# Altium PCB 把手指纹锁2020926.PcbDoc
Units mm, origin at the board's own origin, x right, y up, seen from the top; angles counter-clockwise.
Board outline 143.51 x 21.34 mm, 2 copper layers (Top Layer, Bottom Layer); 78 components, 61 nets, 264 pads, 198 vias.
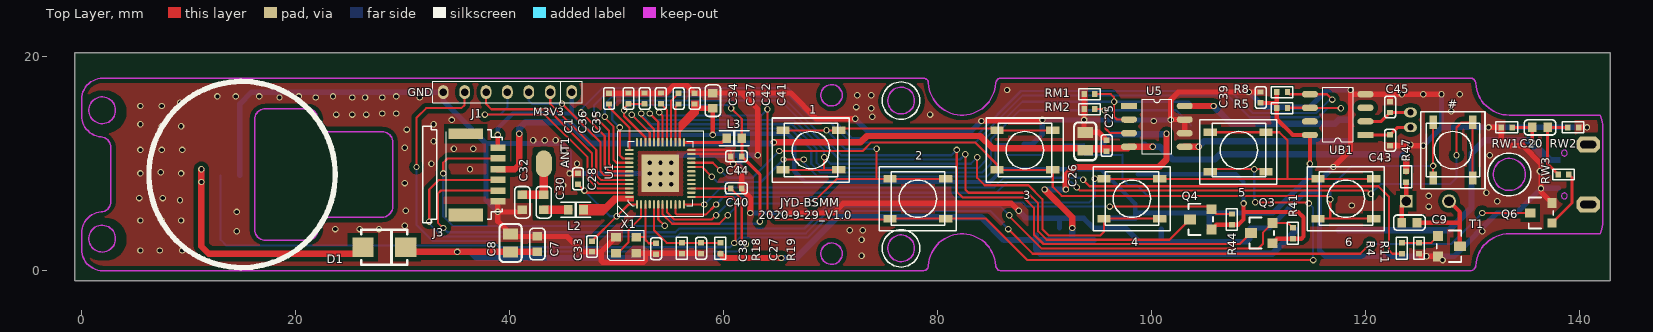
[diagram p0: Top Layer view]
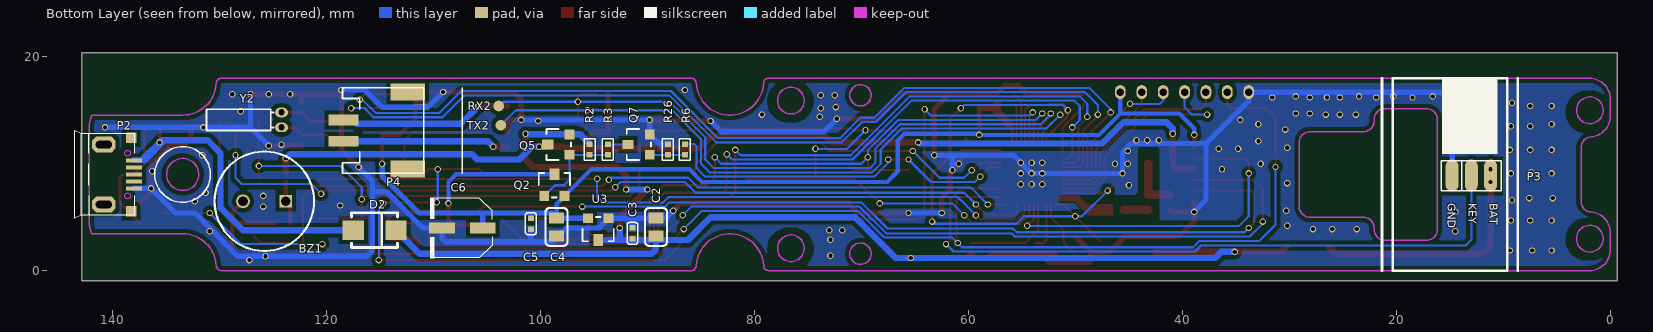
[diagram p1: Bottom Layer view, seen from below]
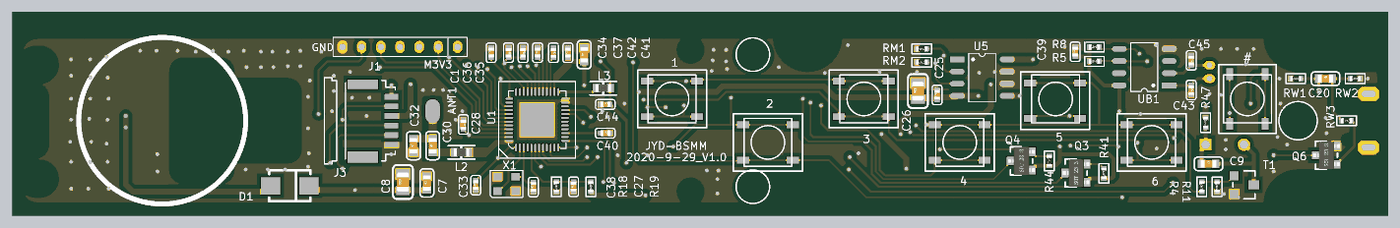
[diagram p2: 3D render of the assembled board from above, using the file's embedded part models]
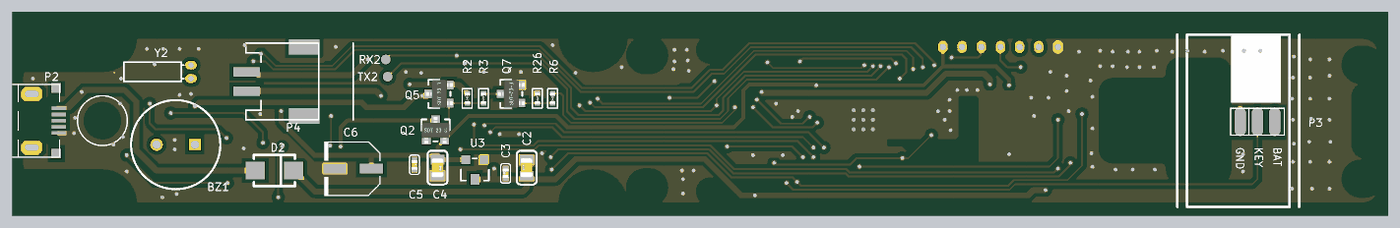
[diagram p3: 3D render of the assembled board from below, using the file's embedded part models]

## Layer stack, top to bottom
Top Layer: signal copper 0.0356
Dielectric: dielectric 0.32, FR-4, Dk 4.8
Bottom Layer: signal copper 0.0356

## Board outline
-0.652,20.395 -0.652,-0.941 142.858,-0.941 142.858,20.395 -0.398,20.395

## Design rules (kind name [scope] priority, off if disabled: settings)
Clearance Clearance_1 [All] p1 off: gap=0.4
Clearance [All] p2: gap=0.1
HoleToHoleClearance [All] p1: gap=0 allowstackedmicrovias=TRUE
MinimumSolderMaskSliver [All] p1: minsoldermaskwidth=0
PolygonConnect [All] p1: connectstyle=Direct reliefconductorwidth=0.254 reliefentries=4 polygonreliefangle="90 Angle" airgapwidth=0.254
RoutingVias [All] p1: holewidth=0.4 width=0.6 viastyle="Through Hole" minholewidth=0.3 minwidth=0.5 maxholewidth=0.4 maxwidth=0.6
SilkToSilkClearance [All] p1: silktosilkclearance=0
SilkToSolderMaskClearance [IsPad] p1: minsilkscreentomaskgap=0 clearancetoexposedcopper=TRUE
SolderMaskExpansion [All] p1: expansion=0.102
Width [All] p1: maxlimit=2 minlimit=0.2 preferedwidth=0.254
24 further rules are at their usual default settings.

## Components (designator, comment, footprint, x,y, rotation, side; value= is the part's Value field where it differs from the comment)
1 "SW" KEY_5.2*3.7*6.4 68.16,11.275 r180 top locked
2 "SW" KEY_5.2*3.7*6.4 78.16,6.735 r180 top locked
3 "SW" KEY_5.2*3.7*6.4 88.16,11.275 r180 top locked
4 "SW" KEY_5.2*3.7*6.4 98.16,6.735 r180 top locked
5 "SW" KEY_5.2*3.7*6.4 108.1,11.1 r180 top
6 "SW" KEY_5.2*3.7*6.4 118.16,6.735 r180 top locked
# "SW" KEY_5.2*3.7*6.4 128.16,11.275 r90 top locked
ANT1 "ANT" ANT_mark 43.2,10 r90 top
BZ1 "BUZZER" BUZZER_D93_L40 125.8,6.5 r0 bottom locked
C1 "100nF" 0402C 49.3,16.1 r90 top
C2 "10uF" 0805C 89.2,4.1 r90 bottom
C3 "100nF" 0402C 91.4,3.5 r90 bottom
C4 "10uF" 0805C 98.5,4.1 r270 bottom
C5 "100nF" 0402C 100.9,4.4 r270 bottom
C6 "220uF" R5*5.8 107.3,4 r0 bottom
C7 "0.1uF" 0603C 42.6,2.5 r90 top
C8 "4.7UF/24V" 0805C 40.1,2.6 r90 top
C9 "10uF" 0603C 124.1,4.5 r0 top (schematic designator c9)
C20 "10uF" 0603C 136.3,13.4 r0 top
C25 "100nF" 0402C 95.8,11.7 r90 top
C26 "22uF" 0805C 93.8,12.1 r90 top
C27 "1nF" 0402C 57.9,2.1 r90 top
C28 "1uF" 0402C 46.4,8.6 r270 top
C30 "1.5pF" 0603C 43.2,6.4 r90 top
C32 "1pF" 0603C 41.2,6.4 r90 top
C33 "100nF" 0402C 47.7,2.271 r90 top
C34 "100nF" 0402C 54.142,16.108 r90 top
C35 "1uF" 0402C 52.628,16.108 r270 top
C36 "100nF" 0402C 51.114,16.108 r270 top
C37 "100nF" 0402C 55.8,16.1 r270 top
C38 "2.7pF" 0402C 53.7,2.071 r90 top
C39 "100nF" 0402C 110.2,16.2 r90 top
C40 "1nF" 0402C 61.197,7.7 r0 top
C41 "10uF" 0603C 59,15.9 r90 top
C42 "100nF" 0402C 57.3,16.1 r90 top
C43 "22pF" 0402C 122.3,12.2 r270 top
C44 "10uF" 0402C 61.2,10.7 r0 top
C45 "22pF" 0402C 122.3,15.3 r270 top
D1 "SS14" DO-214AA 28.3,2.2 r180 top
D2 "SS14" DO-214AA 115.5,3.8 r0 bottom
J1 "7P" 7P-2.0MM 45.8,16.7 r180 top
J3 "指纹串口" SM06B-SRSS-TB 38.9,9 r270 top locked
L2 "2nH" 0603L 46.2,5.7 r0 top
L3 "2.2UH" 0603L 61,12.4 r0 top
P2 "MICROUSB" MICRO-USB_F-B 139.4,9 r270 bottom
P3 "电池盒" 3P-1.8MM 14.8,8.9 r180 bottom
P4 "电机接口" S2B-PH-SM3-TB 116.9,13.1 r90 bottom
Q2 "SI2301" "SOT-23 - GDS" 98.7,8 r180 bottom
Q3 "BSS123W" "SOT-23 - GDS" 110.3,3.53 r90 top
Q4 "BSS123W" "SOT-23 - GDS" 104.6,4.8 r90 top
Q5 "SI2301" "SOT-23 - GDS" 98.3,11.8 r90 bottom
Q6 "PMBT3904" "SOT-23 - BCE" 136.4,5.4 r90 top
Q7 "PMBT3904" "SOT-23 - BCE" 90.8,11.8 r90 bottom
R2 "100K" 0402R 95.4,11.337 r270 bottom
R3 "1K" 0402R 93.7,11.336 r90 bottom
R4 "200R" 0402R 123.4,2.1 r270 top
R5 "10K" 0402R 112.2,15.2 r180 top
R6 "4.7K" 0402R 86.5,11.336 r90 bottom
R8 "10K" 0402R 112.2,16.7 r180 top
R11 "10K" 0402R 125,2.1 r270 top
R18 "100K%1" 0402R 56.1,2.1 r270 top
R19 "510%1" 0402R 59.7,2.1 r90 top
R26 "10K" 0402R 88.1,11.336 r90 bottom
R41 "10K" 0402R 113.2,3.5 r270 top
R44 "10K" 0402R 107.5,4.8 r270 top
R47 "10R" 0402R 123.8,8.8 r90 top
RM1 "10K" 0402R 94.2,16.508 r0 top
RM2 "10K" 0402R 94.2,15.108 r0 top
RW1 "100K" 0402R 133.2,13.4 r180 top
RW2 "100K" 0402R 139.4,13.4 r180 top
RW3 "100R" 0402R 138.5,9 r180 top
T1 "SS8050" SOT-23-3L 127.8,2.3 r270 top
U1 "BK3435QFN48_A" QFN48_6*6*0.4 54.1,9.1 r90 top
U3 "HT7533" SOT-23-3L 94.6,3.898 r0 bottom
U5 "CP2117" SOP8 100.5,13.5 r0 top
UB1 "PCF8563" SOP8 117.4,14.6 r180 top
X1 "16MHZ" XTAL3225 50.9,2.4 r0 top
Y2 "32.768KHZ" 晶振-9 124.2,13.4 r90 bottom

## Footprints (in the part's own frame and the unit in brackets; to place one, negate y for a bottom-side part, rotate by r counter-clockwise, add the part's x,y. Pads: shape width x height; smd on the part's side, far side on the other; paste and mask are expansions set on the pad)
3P-1.8MM [mm]
  oval 1.2x3 smd: 1(0,0) 2(1.8,0) 3(3.6,0)
  silkscreen extent -1,-1.4 4.6,1.4
7P-2.0MM [mm]
  oval 1x1.3 hole 0.7 mask+0.05: 1(0,0) 2(2,0) 3(4,0) 4(6,0) 5(8,0) 6(10,0) 7(12,0)
  silkscreen extent -1,-1 13,1
0402C [mil]
  rect 20x22 smd mask+2: 1(-20,0) 2(20,0)
  silkscreen extent -40,-20 40,20, body extent -19,-12 20,12, height 8
0402R [mil]
  rect 20x22 smd mask+2: 1(-20,0) 2(20,0)
  silkscreen extent -40,-20 40,20, body extent -23,-11 23,11, height 16
0603C [mm]
  rect 0.8x0.9 smd: 1(-0.711,0) 2(0.711,0)
  silkscreen extent -1.47,-0.71 1.47,0.71, body extent -0.8,-0.4 0.8,0.4, height 0.3
0603L [mm]
  rect 0.8x0.9 smd: 1(-0.711,0) 2(0.711,0)
  silkscreen extent -1.4,-0.7 1.4,0.7, body extent -0.82,-0.41 0.82,0.41, height 0.46
0805C [mil]
  rect 40x56 smd: 1(-33,0) 2(33,0)
  silkscreen extent -70,-41 70,41, body extent -39,-25 39,25, height 30
ANT_mark [mm]
  oval 2.5x1.5 smd: 1(0,0)
BUZZER_D93_L40 [mm]
  rect 1.2x1.2 hole 0.9: 1(-2,0)
  round 1.3 hole 0.9: 2(2,0)
  silkscreen extent -4.65,-4.65 4.65,4.65
DO-214AA [mm]
  rect 2x1.8 smd: 1(2,0) 2(-2,0)
  silkscreen extent -2.15,-1.63 2.15,1.63
KEY_5.2*3.7*6.4 [mm]
  rect 1.25x0.7 smd: 1(-2.6,1.85) 1(2.6,1.85) 2(-2.6,-1.85) 2(2.6,-1.85)
  silkscreen extent -3.6,-3 3.6,3
MICRO-USB_F-B [mm]
  rect 0.36x1.5 smd mask+0.05: 1(-1.3,1.4) 2(-0.65,1.4) 3(0,1.4) 4(0.65,1.4) 5(1.3,1.4)
  oct 1.5x2.2 hole 0.7 slot 1.5 at 90 deg mask+0.05: 6(2.8,-1.4) 7(-2.8,-1.4)
  rect 1x1 smd: 8(3.429,1.143) 9(-3.429,1.143)
  Keep-Out Layer circle w0.1: c2,0.813 r0.275
  Keep-Out Layer circle w0.1: c-2,0.813 r0.275
  silkscreen extent -4.1,-4.14 4.1,1.5
QFN48_6*6*0.4 [mm]
  rect 3.5x3.5 smd: 0(0,0)
  oval 0.8x0.2 smd: 1(-2.9,2.2) 2(-2.9,1.8) 3(-2.9,1.4) 4(-2.9,1) 5(-2.9,0.6) 6(-2.9,0.2) 7(-2.9,-0.2) 8(-2.9,-0.6) 9(-2.9,-1) 10(-2.9,-1.4) 11(-2.9,-1.8) 12(-2.9,-2.2) 25(2.9,-2.2) 26(2.9,-1.8) 27(2.9,-1.4) 28(2.9,-1) 29(2.9,-0.6) 30(2.9,-0.2) 31(2.9,0.2) 32(2.9,0.6) 33(2.9,1) 34(2.9,1.4) 35(2.9,1.8) 36(2.9,2.2)
  oval 0.2x0.8 smd: 13(-2.2,-2.9) 14(-1.8,-2.9) 15(-1.4,-2.9) 16(-1,-2.9) 17(-0.6,-2.9) 18(-0.2,-2.9) 19(0.2,-2.9) 20(0.6,-2.9) 21(1,-2.9) 22(1.4,-2.9) 23(1.8,-2.9) 24(2.2,-2.9) 37(2.2,2.9) 38(1.8,2.9) 39(1.4,2.9) 40(1,2.9) 41(0.6,2.9) 42(0.2,2.9) 43(-0.2,2.9) 44(-0.6,2.9) 45(-1,2.9) 46(-1.4,2.9) 47(-1.8,2.9) 48(-2.2,2.9)
  silkscreen extent -4,-4 4,4
R5*5.8 [mm]
  rect 2.4x1 smd: 1(-1.9,0) 2(1.9,0)
  silkscreen extent -2.8,-2.85 3,2.85
S2B-PH-SM3-TB [mm]
  rect 1x2.8 smd mask+0.05: 1(-1,1.5) 2(1,1.5)
  rect 1.6x3.2 smd mask+0.05: A(-3.6,-4.5) B(3.6,-4.5)
  silkscreen extent -4,-9.6 4,1.6
SM06B-SRSS-TB [mm]
  rect 0.6x1.4 smd paste+0: 1(-2.5,0) 2(-1.5,0) 3(-0.5,0) 4(0.5,0) 5(1.5,0) 6(2.5,0)
  rect 1x3.2 smd paste+0: A(-3.8,-3)
  rect 1.2x3.2 smd: B(3.8,-3)
  silkscreen extent -4.5,-7 4.5,0.4
SOP8 [mm]
  rect 1.5x0.6 smd mask+0.05: 1(-2.6,1.905)
  oval 1.5x0.6 smd mask+0.05: 2(-2.6,0.635) 3(-2.6,-0.635) 4(-2.6,-1.905) 5(2.6,-1.905) 6(2.6,-0.635) 7(2.6,0.635) 8(2.6,1.905)
  round 0.4 on Top Overlay mask+0.05: ""(-0.949,1.905)
  silkscreen extent -1.4,-2.54 1.4,2.54
"SOT-23 - BCE" [mm]
  rect 0.85x0.85 smd: B(-0.95,-1.016)
  rect 0.85x1 smd: C(0,1.016)
  rect 0.914x0.85 smd: E(0.95,-1.016)
  silkscreen extent -1.46,-1.14 1.46,1.14, body extent -1.45,-1.4 1.45,1.4, height 1.2
"SOT-23 - GDS" [mil]
  rect 36x43.31 smd: D(0,40)
  rect 36x36 smd: G(-37.4,-40) S(37.4,-40)
  silkscreen extent -57,-45 58,45, body extent -57,-55 57,55, height 47
SOT-23-3L [mil]
  rect 36x36 smd: 1(-37.4,-40) 2(37.4,-40)
  rect 36x43.31 smd: 3(0,40)
  silkscreen extent -57,-45 58,45
XTAL3225 [mm]
  rect 0.9x0.8 smd: 1(-0.95,-0.75) 2(0.95,-0.75) 3(0.95,0.75) 4(-0.95,0.75)
  silkscreen extent -1.7,-1.4 1.7,1.4
晶振-9 [mm]
  oval 0.9x1.2 hole 0.6: 1(0,0) 2(1.4,0)
  rect 0x0 smd: 3(0.635,8)
  silkscreen extent -0.3,0.76 1.7,7

## Part data
1 2 3 4 5 6 #: "Switch"
ANT1: library part Socket, "Socket"
BZ1: "Buzzer"
C1 C28 C30 C32 C33 C34 C35 C36 C37 C38 C41 C42 C44: library part Cap, "Capacitor"
C2 C4 C9: library part CAP-P, "Capacitor, tolerance ±20%"
C3 C7 C8: library part "CAP NP"
C5 C6 C20 C25 C26 C27: library part CAP-NP, "Capacitor, Ceramic"
C39 C40 C43 C45: library part C
D1 D2: library part D
J3: library part "Header 6", "Header, 6-Pin"
L2 L3: "Power Inductor, 4.7uH, 0.7A, 260mR DCR"
P2 P4: library part MHDR1X2, "Header, 2-Pin"
P3: library part "Header 3", "Header, 3-Pin"
Q2 Q5: library part PWRMOSFET_EP_DGS_0
Q3 Q4: library part BSS123L_0
R2 R3 R5 R6 R8 R26 RW1 RW2 RW3: library part R
R4 R11 R47: library part R_Dup1
R18 R19: library part Res2, "Resistor"
R41 R44: library part RES
RM1 RM2: library part Pro71C3.TMP_UnNamed_1
T1: library part NPN_BJT, "Bipolar Junction Transistor"
U1: library part EFR32BG1-QFN48
U3: library part XC6206P302M
U5: library part AM24LC02_0
UB1: library part IC8
Y2: library part 晶振

## Free pads (board coordinates)
  round 1 smd far side: 0(103.9,15.4) 1(103.7,13.6)

## Via types
v1: diameter 0.6, hole 0.4, Top Layer to Bottom Layer, tented both sides, 198 vias

## Nets (pads, with @x,y where several pads share a name; then routed paths per layer and width w, separated by ;. In a path a pad name is that pad's centre, name@x,y a point inside that pad or via, vN(x,y) a via of type N, cw(c..) or ccw(c..) an arc to the next point about the centre after c; other vN are vias at no path point)
ANT: ANT1.1 C30.2 C32.2 | length 4.9
  Top Layer w0.8: C32.2 C30.2 ; C30.2@43.189,7.122 C30.2 ; ANT1.1 C30.2
BAT_ADC: C27.2 R18.1 R19.2 U1.5 | length 9.1
  Top Layer w0.2: U1.5 53.5,3.8 54.692,2.608 R18.1 R19.2
BEEP: R4.2 U1.12 | length 74
  Top Layer w0.2: U1.12 v1(58.2,6.2) ; v1(93.6,8.5) 94.2,7.9 121.2,7.9 122.2,6.9 122.2,1.9 122.508,1.592 R4.2
  Bottom Layer w0.2: v1(58.2,6.2) 59.8,7.8 82.8,7.8 85.3,7.8 86.2,8.7 93.4,8.7 v1(93.6,8.5)
CE(RST): U1.16
GND: C1.2 C2.2 C3.2 C4.2 C5.2 C6.2 C7.2 C8.2 C25.2 C26.2 C27.1 C28.1 C32.1 C33.1 C34.2 C35.1 C36.1 C38.1 C39.2 C40.2 C41.2 C42.2 C43.2 C44.1 C45.1 J1.7 J3.6 P2.5 P3.1 Q6.E Q7.E R11.2 R18.2 R26.2 RM1.1 RM2.1 RW1.2 RW2.1 T1.2 U1.0 U1.23 U1.24 U3.1 U5.6 U5.7 UB1.4 X1.2 X1.4 | length 354
  Top Layer w0.2: U1.23 60.492,10.9 C44.1 60.692,11.208 60.6,11.3 U1.24
  Top Layer w0.5: J3.6 v1(38.9,5.5) ; C32.1 41.011,5.5 v1(38.9,5.5) ; v1(45.6,9.1) 46.392,9.1 C28.1 ; C1.2 54.134,16.608 C34.2 54.638,16.616 55.334,17.312 56.596,17.312 C42.2 58.997,16.608 C41.2 61.689,16.611 ; X1.4 48.563,1.763 ; X1.2 52.7,1.65 ; C27.1 57.842,1.65 52.7,1.65 ; C44.1 60.692,10.208 v1(61.5,9.4) 61.705,9.195 C40.2 61.705,7.595 62.5,6.8 v1(62.5,5.4) ; v1(63.2,10.8) 63.2,15.1 61.689,16.611 ; v1(65.6,5.4) 70.3,5.4 71.2,6.3 86.9,6.3 v1(87.6,5.6) ; v1(72.3,14.2) 68.7,14.2 66.289,16.611 61.689,16.611 ; v1(84.1,14) 89.7,14 v1(89.8,14.1) ; RM1.1 RM2.1 v1(93.692,14.1) 93.692,13.046 C26.2 95.07,12.938 C25.2 ; v1(101.8,14.1) 101.8,16 102.508,16.708 v1(109.1,16.708) C39.2 ; v1@101.835,14.135 U5.7 U5.6 ; v1(117,9.7) 118.6,11.3 118.6,16.6 ; v1(118.6,16.9) 118.6,16.6 ; C43.2 125.392,11.692 v1(125.4,11.7) ; C45.1 122.3,16.5 ; R11.2 125.242,1.35 v1(125.7,1.35) T1.2 ; v1(127.1,16.5) 122.3,16.5 ; v1(131.5,13.4) RW1.2 132.692,12.308 133.3,11.7 134.7,11.7 136.4,10 v1(136.4,7.7) 136.4,7.366 Q6.E ; RW2.1 v1(140.7,13.4) ; v1(38.9,5.5) 38.9,4.638 C8.2 40.327,3.211 C7.2 45.389,3.211 46.837,1.763 C33.1 48.563,1.763 ; 48.563,1.763 48.563,0.937 48.7,0.8 52.5,0.8 52.7,1 52.7,1.65 ; 118.6,16.6 118.695,16.505 UB1.4 120.005,16.5 122.3,16.5
  Bottom Layer w0.5: P3.1 14.8,15.6 15.9,16.7 J1.7 33.8,15.9 37.8,11.9 ; v1(38.9,5.5) 37.8,6.6 37.8,11.9 ; v1(61.5,9.4) 61.5,10.8 ; v1(62.5,5.4) v1(65.6,5.4) ; v1(63.2,10.8) 61.5,10.8 ; v1(72.3,14.2) 73.5,13 83.1,13 v1(84.1,14) ; v1(87.6,5.6) 88.262,4.938 ; R26.2 88.878,11.844 Q7.E 89.784,14.084 v1(89.8,14.1) v1(93.692,14.1) v1(101.8,14.1) ; 88.162,4.938 88.262,4.938 ; C2.2 88.262,4.938 ; C2.2@89.225,4.914 91.5,4.914 ; C3.2 91.4,4.814 91.5,4.914 ; C5.2 100.9,2.7 ; v1(109.1,16.708) 110.508,15.3 114.8,15.3 116.4,16.9 v1(118.6,16.9) ; v1(117,9.7) 115.7,8.4 115.7,7.4 ; v1(125.4,11.7) 127.1,13.4 ; v1(127.1,16.5) 127.1,13.4 ; P2.5 v1(136.4,7.7) 134.1,5.4 132.3,5.4 128.25,1.35 v1(125.7,1.35) 116.25,1.35 115.7,1.9 115.7,7.4 ; v1(140.7,13.4) v1(131.5,13.4) 127.1,13.4 ; 37.8,11.9 44.8,11.9 45.6,11.1 v1(45.6,9.1) v1(53.1,9.1) v1(54.1,9.1) 55.8,10.8 61.5,10.8 ; 91.5,4.914 U3.1 94.557,4.006 97.575,4.006 98.881,2.7 100.9,2.7 ; 100.9,2.7 108.9,2.7 109.2,3 C6.2 111,4 114.4,7.4 115.7,7.4
  other v1: 127.2,1 72.9,1.4 5.5,1.9 7.3,1.9 9.4,1.9 72.9,2.9 14.5,3.7 130.9,3.7 71.8,3.8 73,3.8 23.7,3.9 26,3.9 27.8,3.9 30.2,4.2 5.5,4.7 7.5,4.7 9.3,4.7 14.5,5.5 30.3,5.6 125.9,6 118.7,6.1 132.3,6.5 9.2,6.6 5.4,6.8 7.6,6.8 125.9,7 131.3,7.3 45,8 53.1,8.1 54.1,8.1 55.1,8.1 30.2,8.2 5.5,9.1 9.3,9.1 9.3,9.1 55.1,9.1 7.4,9.2 136.3,9.3 36.3,9.5 32.7,10 45.1,10 46.3,10 60.9,10 53.1,10.1 54.1,10.1 55.1,10.1 131.6,10.8 45.1,11.2 5.5,11.3 7.5,11.3 9.4,11.3 34.8,11.4 36.6,11.4 30.2,11.5 124.2,11.8 32.9,12.1 42.2,12.2 43.3,12.2 44.3,12.2 30.4,13.2 7.5,13.5 9.3,13.5 5.5,13.7 32.9,13.7 100.2,14 34.6,14.1 73.9,14.4 23.8,14.6 25.3,14.6 26.6,14.6 79.3,14.6 28.1,14.7 29.4,14.7 128,14.9 73.8,15.2 72.4,15.3 5.5,15.4 7.5,15.4 9.2,15.7 18.5,16.2 21.9,16.2 25.3,16.2 26.5,16.2 28.1,16.2 31.6,16.2 12.7,16.3 14.4,16.3 16.6,16.3 20.3,16.3 23.5,16.3 29.4,16.3 72.5,16.4 73.8,16.4 123.4,16.5 125.4,16.5 128.8,16.5 86.5,16.9
INT_FP: J3.2 U1.6 | length 33.6
  Top Layer w0.2: v1(33.8,9.1) 33.8,10.1 34.2,10.5 J3.2 ; U1.6 53.9,4.8 v1(54.5,4.2)
  Bottom Layer w0.2: v1(33.8,9.1) 33.8,5.1 34.7,4.2 v1(54.5,4.2)
IRQ_RF: U1.4
IRQ_TSM12: U1.11
KEYX_1: 1.2 2.2 3.2 U1.7 | length 63
  Top Layer w0.2: U1.7 54.3,5.3 55.2,4.4 59.6,4.4 v1(60.4,5.2) ; 1.2@65.56,13.125 v1(69.625,13.125) 70.76,13.125 70.935,13.3 85.385,13.3 85.56,13.125 3.2@90.76,13.125 ; v1(68.3,6.3) 70.585,8.585 74.3,8.585 ; v1(74.3,11.4) 74.3,8.585 ; 2.2@80.76,8.585 75.56,8.585 74.3,8.585
  Bottom Layer w0.2: v1(60.4,5.2) 61.5,6.3 v1(68.3,6.3) ; v1(69.625,13.125) 71.35,11.4 v1(74.3,11.4)
KEYX_2: 4.2 5.2 6.2 U1.8 | length 81.2
  Top Layer w0.2: U1.8 54.7,5.5 55.4,4.8 58.9,4.8 v1(59.3,5.2) ; v1(94.7,8.6) 95.545,8.6 95.56,8.585 100.76,8.585 112.7,8.585 ; 5.2@105.5,12.95 111.95,12.95 112.7,12.2 112.7,8.585 ; 6.2@120.76,8.585 115.56,8.585 112.7,8.585
  Bottom Layer w0.2: v1(59.3,5.2) 61,6.9 88.014,6.9 88.514,6.4 94.2,6.4 94.7,6.9 v1(94.7,8.6)
KEYX_3: U1.9
KEYX_4: #.2 U1.10 | length 87.8
  Top Layer w0.2: U1.10 55.5,5.4 55.649,5.251 58.351,5.251 v1(59.3,6.2) ; v1(93,7.8) 93.3,7.5 120.2,7.5 v1(120.5,7.2) ; v1(128.5,10.8) 128.5,13.4 128.975,13.875 130.01,13.875 #.2@130.01,8.675
  Bottom Layer w0.2: v1(59.3,6.2) 60.4,7.3 85.5,7.3 86.5,8.3 92.5,8.3 v1(93,7.8) ; v1(120.5,7.2) 121.4,8.1 127.9,8.1 128.5,8.7 v1(128.5,10.8)
KEYY_1: 3.1 6.1 #.1 U1.21 | length 88.7
  Top Layer w0.2: U1.21 59,10.1 v1(59.7,9.4) ; v1(65.2,11.2) 67,11.2 73,11.2 73.8,12 83.5,12 85.56,9.94 85.56,9.425 90.76,9.425 90.76,7.84 91.6,7 116.4,7 v1(116.7,6.7) 116.7,4.985 ; 6.1@115.56,4.885 6.1@120.76,4.885 ; #.1@126.31,8.675 v1(126.31,9.8) #.1@126.31,13.875
  Bottom Layer w0.2: v1(59.7,9.4) 60.4,8.7 62.7,8.7 v1(65.2,11.2) ; v1(116.7,6.7) 116.7,7.8 118.7,9.8 v1(126.31,9.8)
KEYY_2: 2.1 5.1 U1.30 | length 94.9
  Top Layer w0.2: v1(54,14.8) 54.3,14.5 U1.30 ; v1(64.1,15.1) 64.1,5.585 64.885,4.8 75.475,4.8 75.56,4.885 84.515,4.885 88.4,1 v1(115.1,1) ; 5.1@105.5,9.25 105.75,9.5 v1(109.6,9.5) 110.45,9.5 5.1@110.7,9.25 ; v1(109.7,6.4) 114.6,6.4 v1(114.7,6.3)
  Bottom Layer w0.2: v1(54,14.8) 54.3,14.5 63.5,14.5 v1(64.1,15.1) ; v1(109.6,9.5) 109.6,6.5 v1(109.7,6.4) ; v1(114.7,6.3) 115.1,5.9 v1(115.1,1)
KEYY_3: 1.1 4.1 U1.31 | length 66.8
  Top Layer w0.2: v1(53.1,14.7) 53.9,13.9 U1.31 ; 1.1@65.56,9.425 69.4,9.425 ; v1(69.4,10.6) 69.4,9.425 ; 1.1@70.76,9.425 69.4,9.425 ; v1(83.7,10.6) 83.7,8.7 84.4,8 88.5,8 89.8,6.7 89.8,3.9 90.4,3.3 95.2,3.3 95.56,3.66 95.56,4.885 4.1@100.76,4.885
  Bottom Layer w0.2: v1(53.1,14.7) 53.7,14.1 66.569,14.1 69.4,11.269 v1(69.4,10.6) 70,10 83.1,10 v1(83.7,10.6)
LED_GREEN: U1.17
LED_RED: U1.18
M3V3: C4.1 C5.1 C6.1 C39.1 C41.1 C42.1 J1.1 J3.1 Q2.S R5.2 R8.2 U1.26 U3.2 UB1.8 | length 113.8
  Top Layer w0.2: U1.26 55.9,13.8 55.908,13.8 56.804,14.696
  Top Layer w0.4: J3.1 v1(38.9,12.7) ; 56.7,14.4 57.3,15 57.3,15.189 C42.1 ; v1(59,12.7) C41.1 ; C39.1 111.684,15.692 ; R8.2 111.692,15.7 111.684,15.692 ; v1(114.8,10) UB1.8 113.205,12.695 111.692,14.208 R5.2 111.684,15.208 111.684,15.692
  Top Layer w0.5: 57.253,15.189 57.3,15.189 C41.1
  Bottom Layer w0.4: v1(38.9,12.7) 38.9,13.3 40.3,14.7 45.8,14.7 ; J1.1 45.8,14.7 ; C4.1 98.475,4.963 98.475,6.259 Q2.S 95.234,9.5 86.1,9.5 84.9,8.3 67.6,8.3 66.6,9.3 66.6,12.193 65.993,12.8 59.1,12.8 v1(59,12.7) 47.8,12.7 45.8,14.7
  Bottom Layer w0.5: U3.2 98.475,4.914 C4.1 ; C4.1@98.6,5.4 111.336,5.4 114.8,8.864 v1(114.8,10) ; C6.1 105.4,5.4
MOTO+: P4.2 U5.8 | length 16.1
  Top Layer w0.6: U5.8 v1(105.795,15.405)
  Bottom Layer w0.6: v1(105.795,15.405) 107.45,13.75 117.15,13.75 117.5,14.1 P4.2
MOTO-: P4.1 U5.5 | length 15.5
  Top Layer w0.6: U5.5 104.395,11.595 v1(104.4,11.6)
  Bottom Layer w0.6: v1(104.4,11.6) 104.9,12.1 P4.1
NetBZ1_1: BZ1.1 C9.1 R47.1 | length 5.8
  Top Layer w0.4: C9.1 123.389,6.089 123.5,6.2 BZ1.1 ; BZ1.1 R47.1 BZ1.1
NetBZ1_2: BZ1.2 C9.2 T1.3 | length 8.7
  Top Layer w0.4: C9.2 128.716,4.5 128.816,4.6 ; BZ1.2 128.816,5.484 128.816,4.6 ; T1.3 128.816,4.6
NetC1_1: C1.1 U1.37 | length 5.1
  Top Layer w0.2: C1.1 49.3,15.3 51.2,13.4 U1.37
NetC20_2: C20.2 RW2.2 RW3.2 | length 6.7
  Top Layer w0.3: RW3.2 137.011,9.981 C20.2 RW2.2
NetC30_1: C30.1 L2.1 | length 2.3
  Top Layer w0.8: C30.1 45.478,5.689 L2.1
NetC34_1: C34.1 U1.29 | length 3.8
  Top Layer w0.2: C34.1@54.143,15.6 54.7,15.043 54.7,14.548 54.7,14.051 U1.29
NetC37_1: C37.1 U1.28 | length 4.9
  Top Layer w0.2: U1.28 55.1,15.908 C37.1
NetC37_2: C37.2 U1.27 | length 3.7
  Top Layer w0.2: U1.27 55.5,15.292 C37.2
NetC38_2: C38.2 U1.3 X1.3 | length 5.1
  Top Layer w0.2: X1.3@52.05,3.15 52.65,3.15 52.7,3.1 ; U1.3 52.7,3.1 ; C38.2 53,2.579 52.7,2.879 52.7,3.1
NetC43_1: C43.1 UB1.1 Y2.1 | length 4.5
  Top Layer w0.3: UB1.1 122.287,12.695 C43.1 122.992,13.4 Y2.1
NetC45_2: C45.2 UB1.2 Y2.2 | length 4.5
  Top Layer w0.3: UB1.2 121.473,13.965 C45.2 122.308,14.8 Y2.2
NetD1_1: D1.1 P3.3 | length 23.4
  Top Layer w0.6: v1(11.2,9.5) v1(11.2,8.3) 11.2,2.3 11.9,1.6 25.7,1.6 D1.1
  Bottom Layer w0.6: P3.3 v1(11.2,9.5)
NetL2_2: L2.2 U1.48 | length 4.8
  Top Layer w0.2: 49.9,6.6 50.2,6.9 U1.48
  Top Layer w0.4: L2.2 49,5.7 49.9,6.6
NetL3_1: L3.1 U1.25 | length 4.1
  Top Layer w0.3: 56.4,12 59.889,12 L3.1
NetQ2_G: Q2.G Q5.G R2.2 R3.1 | length 8.9
  Bottom Layer w0.2: R3.1 R2.2 97.263,10.829 Q5.G 97.284,8.516 97.8,8 98.634,8 Q2.G
NetQ6_B: Q6.B RW3.1 | length 5.5
  Top Layer w0.254: Q6.B 139.3,6.334 139.3,8.708 RW3.1
NetQ7_B: Q7.B R6.1 R26.1 | length 3.3
  Bottom Layer w0.2: R6.1 R26.1 89.763,10.829 Q7.B
NetQ7_C: Q7.C R3.2 | length 1.9
  Bottom Layer w0.2: Q7.C 93.656,11.8 R3.2
NetR4_1: R4.1 R11.1 T1.1 | length 3.6
  Top Layer w0.2: R4.1 R11.1 126.142,2.608 T1.1
NetU1_2: U1.2 X1.1 | length 5.4
  Top Layer w0.2: X1.1@50.15,1.65 50.15,1.7 51.1,2.65 51.1,3.8 52.3,5 U1.2
P04/SCK: J1.3 U1.43 | length 14.7
  Top Layer w0.2: v1(44.9,15.6) 48.5,12 48.5,9.3 48.9,8.9 U1.43
  Bottom Layer w0.2: J1.3 41.8,15.9 42.1,15.6 v1(44.9,15.6)
P05/MOSI: J1.2 U1.44 | length 12.8
  Top Layer w0.2: J1.2 43.8,15.6 48.1,11.3 48.1,8.934 48.534,8.5 U1.44
P06/MISO: J1.5 U1.45 | length 18.9
  Top Layer w0.2: J1.5 37.8,15.6 38.3,15.1 43.6,15.1 47.7,11 47.7,8.769 48.369,8.1 49.169,8.1 U1.45
P07/NSS: J1.4 U1.46 | length 21.3
  Top Layer w0.2: v1(37.7,14.6) 43.3,14.6 47.3,10.6 47.3,8.603 48.203,7.7 49.003,7.7 49.334,7.7 U1.46
  Bottom Layer w0.2: v1(37.7,14.6) 39.1,14.6 39.8,15.3 J1.4
PWR_CTL: R6.2 U1.20 | length 34.5
  Top Layer w0.2: U1.20 58,9.7 v1(58.9,8.8) ; v1(65.6,10.4) 67.3,10.4 67.5,10.2 v1(67.5,10.4)
  Bottom Layer w0.2: v1(58.9,8.8) 59.4,8.3 63.5,8.3 v1(65.6,10.4) ; v1(67.5,10.4) 67.5,10.1 68.8,8.8 84.6,8.8 85.4,9.6 85.4,11.6 85.644,11.844 R6.2
REMOTO: U1.19
RSTN: J1.6 Q6.C U1.13 | length 134.1
  Top Layer w0.2: v1(31.3,9.7) 31.3,14.3 32.2,15.2 35.5,15.2 35.8,15.5 J1.6 ; U1.13 60.8,6.9 61.1,6.6 61.1,2.7 v1(61,2.6) ; v1(86.6,3.9) 88.9,1.6 119.5,1.6 v1(120.4,2.5) ; v1(130.9,5.4) 131.1,5.4 Q6.C
  Bottom Layer w0.2: v1(31.3,9.7) 31.3,4.3 32.8,2.8 38.4,2.8 39,2.2 60.6,2.2 v1(61,2.6) 61.5,3.1 67.851,3.1 70.351,5.6 84.9,5.6 v1(86.6,3.9) ; v1(120.4,2.5) 128,2.5 v1(130.9,5.4)
RX2/MOTO0: pad.0 RM1.2 U1.32 U5.2 | length 66.9
  Top Layer w0.2: v1(52.3,14.7) 52.3,14.434 53.5,13.234 U1.32 ; RM1.2 96.192,16.508 96.5,16.2 v1(96.5,15.8) 96.5,14.4 96.765,14.135 U5.2
  Bottom Layer w0.2: v1(52.3,14.7) 52.3,14.651 53.251,13.7 66.403,13.7 68.7,11.403 68.7,10.1 69.2,9.6 83.8,9.6 84.6,10.4 84.6,12.469 87.931,15.8 v1(96.5,15.8) 103.5,15.8 pad.0
SCL: R5.1 U1.41 UB1.6 | length 88.5
  Top Layer w0.2: v1@47.8,14.6 v1(47.9,14.6) ; v1@47.85,14.55 49.3,13.1 49.3,10 49.6,9.7 50.666,9.7 U1.41 ; R5.1 112.743,15.235 UB1.6 114.835,15.2 v1(117.7,15.2)
  Bottom Layer w0.2: v1(47.9,14.6) 47.9,15.5 49.1,16.7 65.834,16.7 68.634,13.9 69.934,13.9 71.834,12 83.566,12 87.966,16.4 107.1,16.4 109.15,14.35 115.6,14.35 116.45,15.2 v1(117.7,15.2)
SDA: R8.1 U1.42 UB1.5 | length 89.4
  Top Layer w0.2: v1(46.7,14.8) 48.9,12.6 48.9,9.7 49.3,9.3 49.703,9.3 U1.42 ; R8.1 112.903,16.505 UB1.5 114.805,16.5 116.4,16.5 v1(116.9,16)
  Bottom Layer w0.2: v1(46.7,14.8) 46.7,15.1 48.7,17.1 66,17.1 68.8,14.3 70.1,14.3 72,12.4 83.4,12.4 87.8,16.8 107.4,16.8 109.45,14.75 115.4,14.75 116.65,16 v1(116.9,16)
SETKEY: C40.1 P3.2 U1.15 | length 65.3
  Top Layer w0.2: U1.15 C40.1 61.705,6.684 61.705,2.895 v1(62.1,2.5)
  Bottom Layer w0.2: P3.2 13,2.9 13.538,2.362 38.273,2.362 38.834,1.8 61.4,1.8 v1(62.1,2.5)
TX2/MOTO1: pad.1 RM2.2 U1.33 U5.3 | length 68
  Top Layer w0.2: v1(51.423,14.591) 51.423,14.577 53.1,12.9 U1.33 ; RM2.2 95.492,15.108 v1(95.6,15) 95.7,14.9 95.7,13.3 96.135,12.865 U5.3
  Bottom Layer w0.2: v1(51.423,14.591) 52.714,13.3 66.237,13.3 68.2,11.337 68.2,10 69,9.2 84.2,9.2 85,10 85,12.303 87.697,15 v1(95.6,15) 102.3,15 pad.1
UART_RD: J3.5 Q4.S R44.1 | length 84.6
  Top Layer w0.2: v1(33.8,4) 33.3,4.5 33.3,7.2 33.6,7.5 J3.5 ; v1(96.1,6) 105.366,6 Q4.S 106.058,5.308 R44.1
  Bottom Layer w0.2: v1(33.8,4) 34.2,3.6 55.5,3.6 55.851,3.951 67.572,3.951 70.02,6.4 87.949,6.4 88.349,6 v1(96.1,6)
UART_RD1: Q4.D U1.39 | length 70.1
  Top Layer w0.2: v1(50.3,13.4) 50.3,10.8 50.6,10.5 U1.39 ; v1(82.6,10.9) 82.6,7.6 82.9,7.3 88.4,7.3 89.4,6.3 89.4,3.7 90.2,2.9 101.684,2.9 Q4.D
  Bottom Layer w0.2: v1(50.3,13.4) 49.6,14.1 49.6,15.4 50.1,15.9 65.334,15.9 70.834,10.4 82.1,10.4 v1(82.6,10.9)
UART_TD: J3.4 Q3.S R41.1 | length 95.8
  Top Layer w0.2: v1(32.5,4.6) 32.5,7.6 33.4,8.5 J3.4 ; v1@86.65,5.15 89.7,2.1 110,2.1 110.4,2.5 110.4,3.564 Q3.S 112.728,4.48 R41.1
  Bottom Layer w0.2: v1(32.5,4.6) 32.5,4.4 33.7,3.2 55.666,3.2 55.966,3.5 67.686,3.5 70.186,6 85.9,6 v1(86.7,5.2)
UART_TD1: Q3.D U1.40 | length 78.1
  Top Layer w0.2: v1(48.9,14.4) 48.9,14.3 49.7,13.5 49.7,10.4 50,10.1 U1.40 ; v1(81.8,11.3) 81.8,7.4 82.35,6.85 88.05,6.85 89,5.9 89,3.4 89.9,2.5 108.254,2.5 Q3.D
  Bottom Layer w0.2: v1(48.9,14.4) 48.9,15.6 49.6,16.3 65.5,16.3 71,10.8 81.3,10.8 v1(81.8,11.3)
V6V: C25.1 C26.1 J3.3 Q5.D R47.2 U5.4 | length 95.3
  Top Layer w0.6: J3.3 40.5,9.5 40.9,9.9 v1(40.9,12.8) ; v1(64.7,12) 72.8,12 73.4,12.6 84,12.6 85.146,11.454 97.759,11.454 U5.4 v1(100.1,11.595) ; C26.1 93.892,11.354 C25.1@95.8,11.354 ; R47.2 v1(123.8,10.5)
  Bottom Layer w0.6: v1(40.9,12.8) 40.9,13.3 41.5,13.9 45.5,13.9 47.5,11.9 64.6,11.9 v1(64.7,12) ; Q5.D 99.516,11.6 100.79,11.6 101.99,10.4 105.9,10.4 106.4,10.9 123.4,10.9 v1(123.8,10.5)
VBAT: C2.1 C3.1 C7.1 C8.1 D1.2 D2.2 Q5.S R2.1 R19.1 U3.3 | length 135.1
  Top Layer w0.6: D1.2 30.738,1.762 v1(35.1,1.762) C8.1 42.573,1.762 C7.1 ; R19.1 60.092,1.2 v1(65.4,1.2) ; v1(90,7.6) 92.6,5 v1(92.6,4) ; v1(92,7.6) 92,8.9 92.8,9.7 100.7,9.7 101.4,10.4 v1(101.4,12.8)
  Bottom Layer w0.6: v1(35.1,1.762) 36.362,1.762 36.924,1.2 v1(65.4,1.2) 66.8,1.2 70.6,5 84.1,5 86.218,2.882 C2.1@89.2,2.882 ; C2.1 C2.1@89.2,2.882 ; v1(90,7.6) v1(92,7.6) ; v1(92.6,4) 92.6,2.882 ; U3.3 92.6,2.882 ; R2.1 96.306,12.75 Q5.S 97.291,12.757 101.357,12.757 v1(101.4,12.8) ; D2.2 111.3,1.6 89.6,1.6 89.2,2 C2.1@89.2,2.882 ; C2.1@89.2,2.882 92.6,2.882
VBUS: C20.1 D2.1 P2.1 RW1.1 | length 30.3
  Top Layer w0.3: RW1.1 C20.1 135.589,12.011 v1(135.6,12)
  Bottom Layer w0.3: v1@135.55,11.95 137.2,10.3
  Bottom Layer w0.5: 135.3,12.2 135.5,12 v1(135.6,12)
  Bottom Layer w0.6: D2.1 127.8,3.8 129.9,5.9 129.9,11 131.1,12.2 135.3,12.2
VDD: C28.2 C33.2 C35.2 C36.2 C44.2 L3.2 U1.1 U1.34 U1.47 | length 56.7
  Top Layer w0.2: C28.2 v1(46.996,7.496) 47.192,7.3 U1.47 ; C33.2 v1(50.021,5.1) 51.121,6.2 U1.1 ; C35.2 C36.2 50.7,15.186 v1(50.7,15) 50.7,14.466 52.7,12.466 U1.34 ; v1(60.7,15.2) 61.7,14.2 61.7,12.411 L3.2
  Top Layer w0.3: C44.2@61.705,10.708 61.711,10.715 L3.2 ; C44.2 63.4,9.008 v1(63.4,4.6)
  Bottom Layer w0.2: v1(46.996,7.496) 49.392,5.1 v1(50.021,5.1) 54.8,5.1 55.5,4.4 63.2,4.4 v1(63.4,4.6) ; v1(50.7,15) 51.2,15.5 60.4,15.5 v1(60.7,15.2)
VDD3V3: Q2.D Q3.G Q4.G R41.2 R44.2 | length 27.7
  Top Layer w0.4: Q4.G 106.058,4.292 R44.2 108.092,4.292 108.6,4.8 108.6,5.5 ; v1@108.6,6.2 108.6,5.5 ; Q3.G 111.728,2.992 R41.2 113.992,2.992 114.2,3.2 114.2,5 113.7,5.5 108.6,5.5
  Bottom Layer w0.4: Q2.D 107.884,9.016 108.6,8.3 v1(108.6,6.3)
pads on no net: J3.A J3.B P2.2 P2.3 P2.4 P2.6 P2.7 P2.8 P2.9 P4.A P4.B U1.14 U1.22 U1.35 U1.36 U1.38 U5. U5.1 UB1. UB1.3 UB1.7 Y2.3

## Polygon pours and split planes (outlines as drawn)
GND on Top Layer "Top Layer-No Net" (solid, remove dead copper, pour order 11): 0,0 0,18 142.2,18 142.2,0.1 142.1,0
GND on Bottom Layer "Top Layer-No Net" (solid, remove dead copper, pour order 11): 0,0 0,18 142.2,18 142.2,0.1 142.1,0

## Keep-outs
Keep-Out Layer:
  circle w0.127: c76.59,15.905 r1.25
  circle w0.127: c133.44,9.005 r1.5
  circle w0.127: c76.59,2.105 r1.25
  circle w0.127: c70.09,16.405 r1
  circle w0.127: c1.921,15.005 r1.25
  circle w0.127: c70.09,1.605 r1
  circle w0.127: c1.921,3.005 r1.25
  lines w0.127: 0,2.005 ccw(c2,2.005) 2,0.005 78.645,0.005 ccw(c78.645,0.505) 79.145,0.478 cw(c82.29,0.309) 85.436,0.478 ccw(c85.935,0.505) 85.935,0.005 129.795,0.005 ccw(c129.795,0.505) 130.295,0.478 cw(c133.44,0.309) 133.44,3.459 141.945,3.459 ccw(c137.19,5.005) 142.19,5.005 142.19,13.005 ccw(c137.19,13.005) 141.945,14.55 133.44,14.55 cw(c133.44,17.7) 130.295,17.531 ccw(c129.795,17.505) 129.795,18.005 85.935,18.005 ccw(c85.935,17.505) 85.436,17.531 cw(c82.29,17.7) 79.145,17.531 ccw(c78.645,17.505) 78.645,18.005 2,18.005 ccw(c2,16.005) 0,16.005 0,14.505 ccw(c2,14.505) 1.833,12.512 cw(c1.75,11.515) 2.75,11.515 2.75,6.494 cw(c1.75,6.494) 1.833,5.498 ccw(c2,3.505) 0,3.505 0,2.005 ; 16.19,3.855 ccw(c17.19,3.855) 17.19,2.855 21.09,2.855 ccw(c21.09,3.855) 22.09,3.855 22.09,4.005 cw(c23.09,4.005) 23.09,5.005 28.09,5.005 ccw(c28.09,6.005) 29.09,6.005 29.09,12.005 ccw(c28.09,12.005) 28.09,13.005 23.09,13.005 cw(c23.09,14.005) 22.09,14.005 22.09,14.155 ccw(c21.09,14.155) 21.09,15.155 17.19,15.155 ccw(c17.19,14.155) 16.19,14.155 16.19,3.855

## Other copper
Top Layer:
  region net M3V3: 57,15.9 57,15 57.5,14.5 57.7,14.7 57.7,15.9
  region net M3V3: 55.8,12.8 57.5,14.5 57.5,15 57.408,15.192 57.092,15.192 55.8,13.9
  region net NetL2_2: 46.5,6.2 48.9,6.2 49.7,7 51.6,7 51.6,6.5 50.1,6.5 48.8,5.2 46.5,5.2
  pour cut-out: 42.1,11.4 42.3,11.6 44,11.6 44.2,11.4 44.2,7.3 44.4,7.1 51.5,7.1 51.6,7 51.6,6.4 51.5,6.3 50.1,6.3 48.5,4.7 42.2,4.7 42.1,4.8
Bottom Layer:
  pour cut-out: 10,10.7 16,10.7 16,7 10,7
  region net VBUS: 135,11.9 136.8,10.1 138.2,10.1 138.2,10.6 137.4,10.6 135.5,12.5 135,12.5
  pour cut-out: 42.1,11.4 42.3,11.6 44,11.6 44.2,11.4 44.2,7.3 44.4,7.1 51.5,7.1 51.6,7 51.6,6.4 51.5,6.3 50.1,6.3 48.5,4.7 42.2,4.7 42.1,4.8
Multi-Layer:
  pour cut-out: 76.836,4.043 76.436,4.043 ccw(c76.436,2.043) 74.436,2.043 ccw(c76.436,2.043) 76.436,0.043 76.836,0.043 ccw(c76.836,2.043) 78.836,2.043 ccw(c76.836,2.043)
  pour cut-out: 76.836,17.843 76.436,17.843 ccw(c76.436,15.843) 74.436,15.843 ccw(c76.436,15.843) 76.436,13.843 76.836,13.843 ccw(c76.836,15.843) 78.836,15.843 ccw(c76.836,15.843)
  pour cut-out: 2.236,16.843 1.836,16.843 ccw(c1.836,14.843) -0.164,14.843 ccw(c1.836,14.843) 1.836,12.843 2.236,12.843 ccw(c2.236,14.843) 4.236,14.843 ccw(c2.236,14.843)
  pour cut-out: 2.236,4.943 1.836,4.943 ccw(c1.836,2.943) -0.164,2.943 ccw(c1.836,2.943) 1.836,0.943 2.236,0.943 ccw(c2.236,2.943) 4.236,2.943 ccw(c2.236,2.943)

## Silkscreen, mask and mechanical layers (free items; w line width, h text height)
Top Overlay:
  circle w0.127: c133.44,9 r2
  circle w0.508: c15,9 r8.7
  circle w0.127: c128.16,11.275 r1.75
  circle w0.127: c118.16,6.735 r1.75
  circle w0.127: c108.16,11.275 r1.75
  circle w0.127: c98.16,6.735 r1.75
  circle w0.127: c88.16,11.275 r1.75
  circle w0.127: c78.16,6.735 r1.75
  circle w0.127: c68.16,11.275 r1.75
  circle w0.127: c76.59,2.105 r1.75
  circle w0.127: c76.59,15.905 r1.75
  lines w0.127: 65.66,8.775 65.66,13.775 70.66,13.775 70.66,8.775 65.66,8.775 ; 75.66,4.235 75.66,9.235 80.66,9.235 80.66,4.235 75.66,4.235 ; 85.66,8.775 90.66,8.775 90.66,13.775 85.66,13.775 85.66,8.775 ; 95.66,4.235 100.66,4.235 100.66,9.235 95.66,9.235 95.66,4.235 ; 105.66,8.775 110.66,8.775 110.66,13.775 105.66,13.775 105.66,8.775 ; 115.66,4.235 115.66,9.235 120.66,9.235 120.66,4.235 115.66,4.235 ; 125.66,8.775 125.66,13.775 130.66,13.775 130.66,8.775 125.66,8.775
  text "GND" at 30.5,16.3 h0.76
  text "M3V3" at 42.2,14.5 h0.76
  text "JYD-BSMM" at 65.3,6 h0.8
  text "2020-9-29_V1.0" at 63.3,4.8 h0.8
Bottom Overlay:
  circle w0.127: c133.44,9.005 r2.6
  rectangle: 10.555,10.905 15.762,18.033
  lines w0.254: 8.65,0 8.65,18 ; 20.318,0 9.65,0 9.65,18 20.35,18 20.35,0 ; 21.35,0.005 21.35,18.005
  text "RX2" at 106.8,15 h0.8
  text "TX2" at 106.9,13.2 h0.8
  text "BAT" at 11.3,6.3 h0.76 r90
  text "KEY" at 13.25,6.3 h0.76 r90
  text "GND" at 15.2,6.3 h0.76 r90